# EAGLE board reduktor (EAGLE 6.5.0)
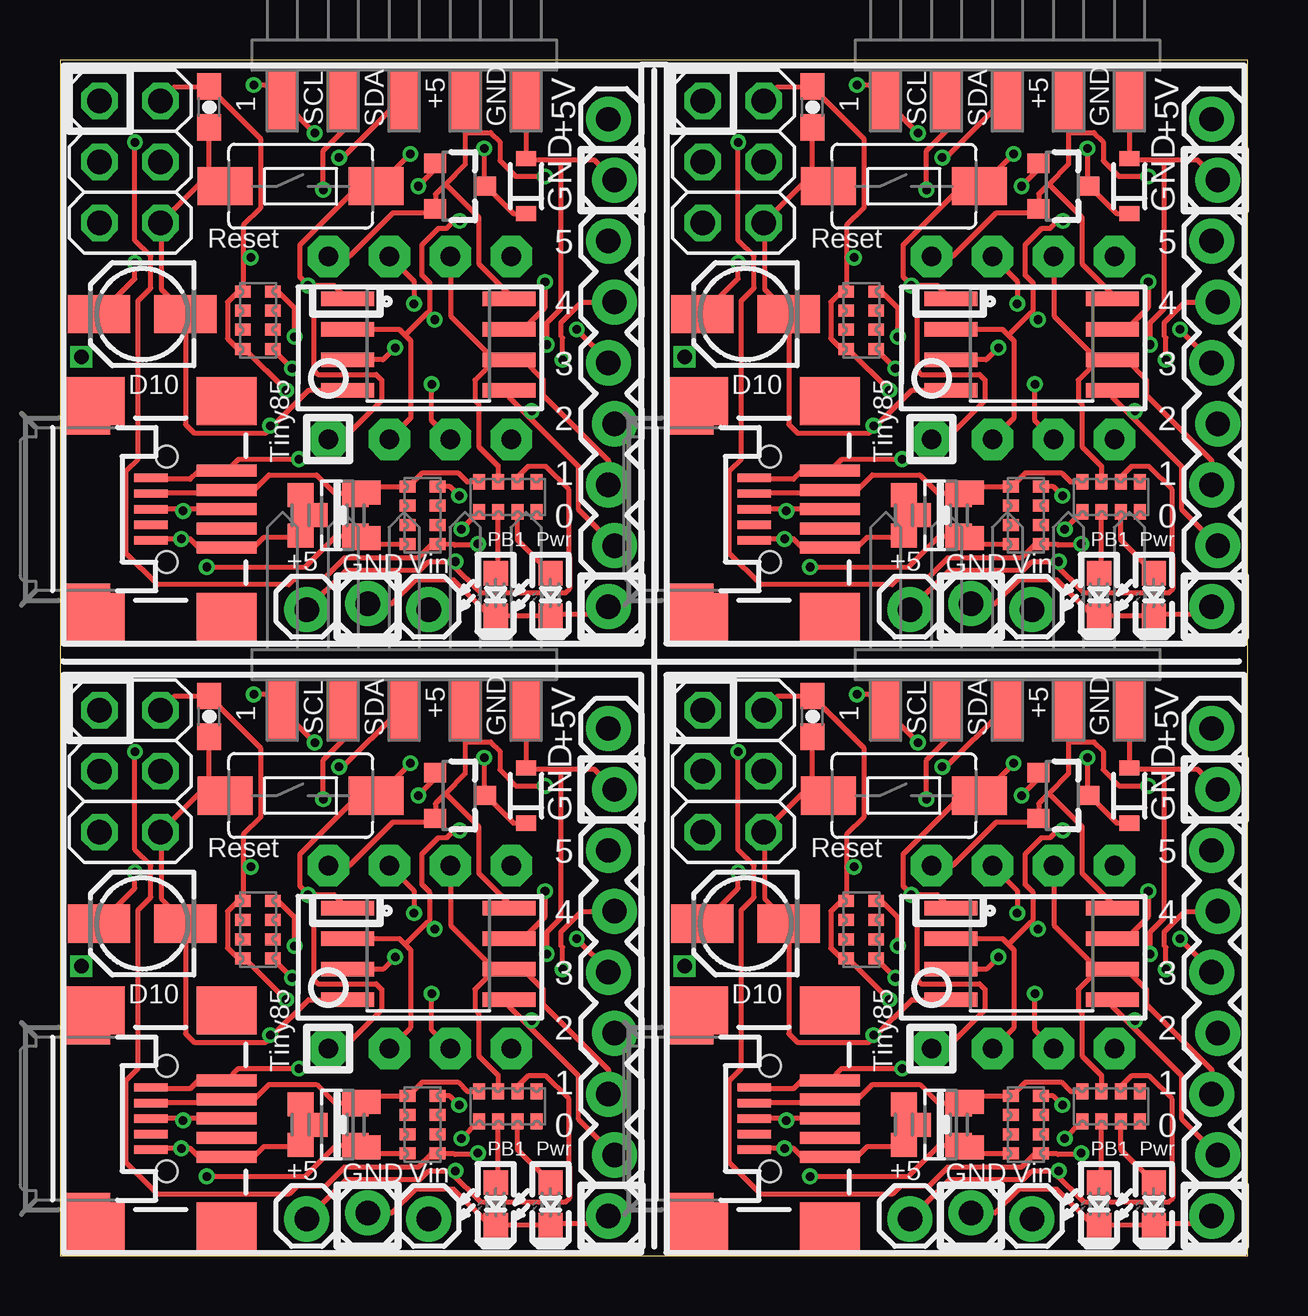
[diagram p0: board, top side]
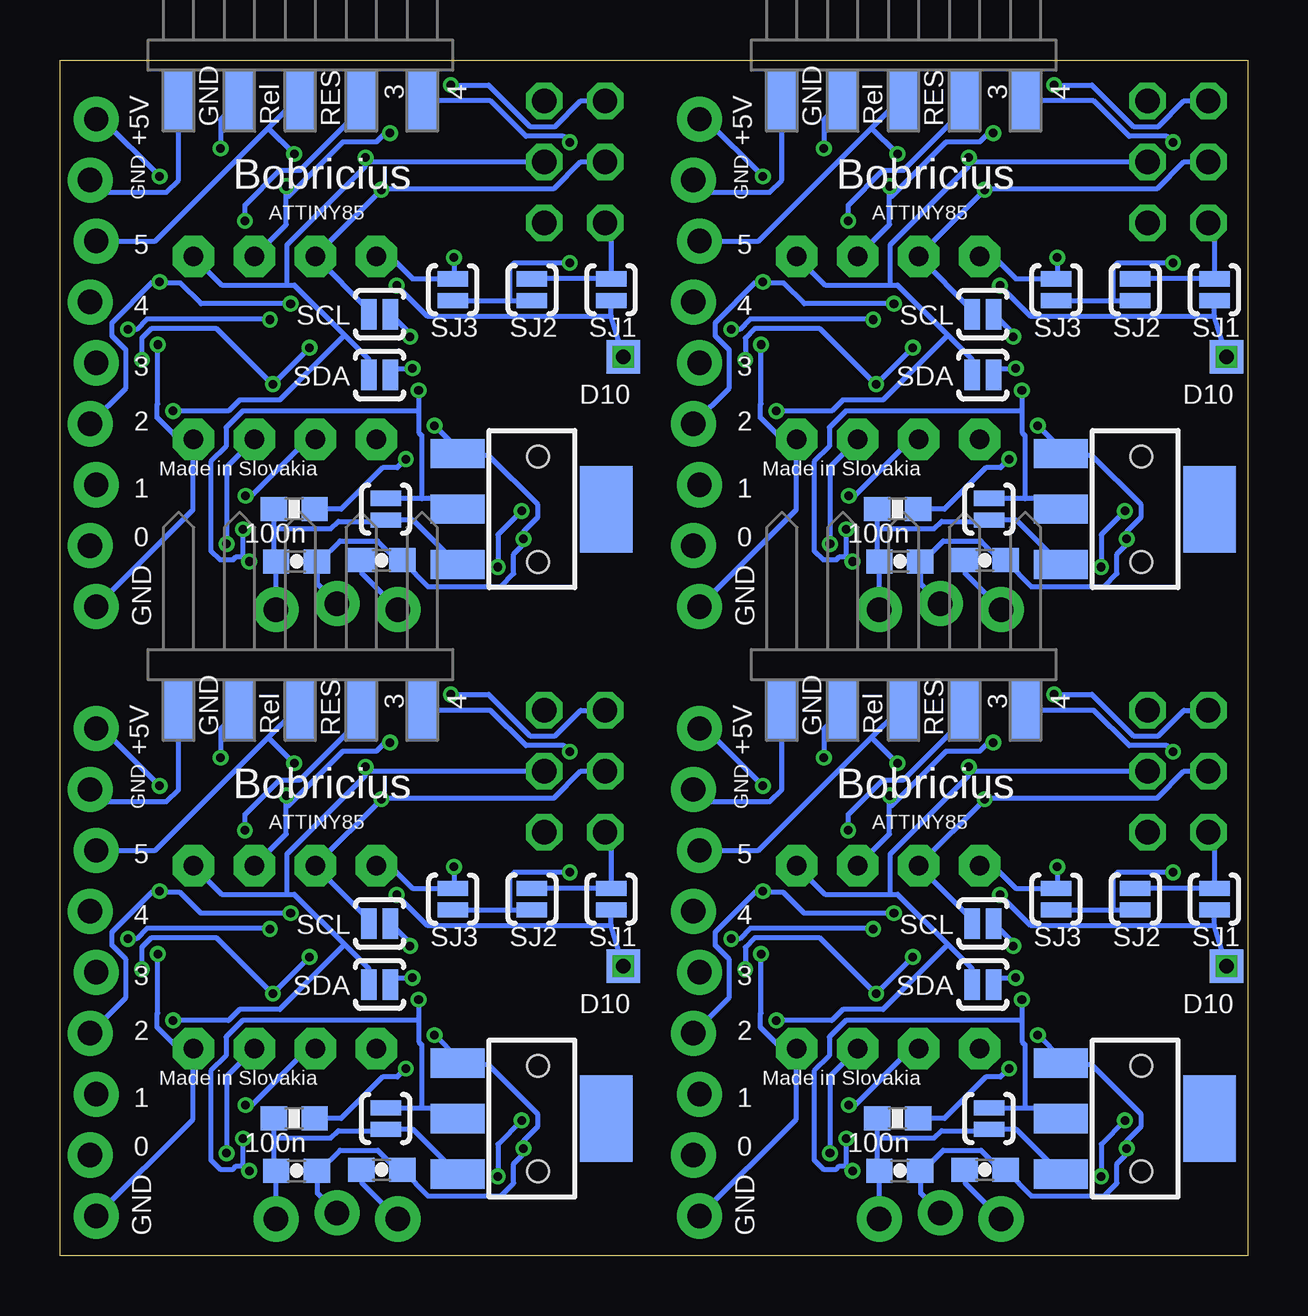
[diagram p1: board, bottom side, seen from below]

Size 49.52 x 49.84 mm. Coordinates in mm from the lower left corner, seen from the top.
Outline: 0,0 49.52,0 49.52,49.84 0,49.84 0,0
Copper layers (1*16): Top 0.035mm / dielectric 1.5mm / Bottom 0.035mm
Design rules "ITEADstudio_DRC": minimum track width 6mil, minimum drill 12mil, track to track 6mil, track to pad 6mil, pad to pad 6mil, via to via 6mil, smd to smd 0mil, copper to edge 10mil, drill to drill 10mil, minimum pad ring 10mil, minimum via ring 6mil, stop-mask expansion 2mil, vias tented up to drill 100mil, thermal gap 10mil
Net classes: 0 default: width 0.203 mm, drill 0.356 mm, clearance 0.203 mm; 1 GND: width 0.203 mm, drill 0.356 mm, clearance 0.203 mm; 2 pwr: width 0.203 mm, drill 0.356 mm, clearance 0.203 mm

## Footprints (pad centres in the part's own frame; a part is rotated, then mirrored left to right if it is on the bottom)
SO08-EIAJ = smd 0.61 x 2.21: 1 -1.905,-3.378; 2 -0.635,-3.378; 3 0.635,-3.378; 4 1.905,-3.378; 5 1.905,3.353; 6 0.635,3.353; 7 -0.635,3.353; 8 -1.905,3.353
0603-CAP = smd 1.1 x 1: 1 -0.85,0; 2 0.85,0
153CLV-0405 = smd 2.6 x 1.6: + 1.8,0; - -1.8,0
SOD-323 = smd 0.63 x 0.83: 1 -1.15,0; 2 1.15,0
SOT23 = smd 1 x 1.4: 1 -0.95,-1.1; 2 0.95,-1.1; 3 0,1.1
TP14SQ = smd 1.4 x 1.4: TP 0,0
SJ_2S-NO = smd 0.635 x 1.27: 1 -0.45,0; 2 0.45,0
SOT223 = smd 1.219 x 2.235: 1 -2.311,-3.099; 2 0,-3.099; 3 2.311,-3.099 | smd 3.6 x 2.2: 4 0,3.099
2X03 = drill 1.016 octagon: 1 -2.54,-1.27; 2 -2.54,1.27; 3 0,-1.27; 4 0,1.27; 5 2.54,-1.27; 6 2.54,1.27
1X03_LOCK = drill 1.016 pad 1.88: 1 0,0.127; 2 2.54,-0.127; 3 5.08,0.127
1X09_LOCK = drill 1.016 pad 1.88: 1 0,0.127; 2 2.54,-0.127; 3 5.08,0.127; 4 7.62,-0.127; 5 10.16,0.127; 6 12.7,-0.127; 7 15.24,0.127; 8 17.78,-0.127; 9 20.32,0.127
LED-0603 = smd 1.016 x 1.016: A 0.889,0; C -0.889,0
0603-RES = smd 1.1 x 1: 1 -0.85,0; 2 0.85,0
R0603 = smd 1 x 1.1: 1 -0.85,0; 2 0.85,0
TACTILE-SWITCH-1101NE = smd 2.3 x 1.6: P$1 -3.15,0; P$2 3.15,0
0603-ARC = smd 0.5 x 0.65: 1 -1.2,-0.625; 2 -0.4,-0.625; 3 0.4,-0.625; 4 1.2,-0.625; 5 1.2,0.625; 6 0.4,0.625; 7 -0.4,0.625; 8 -1.2,0.625
ES_SOT23-3 = smd 0.8 x 0.9: 1 -0.95,-1; 2 0.95,-1; 3 0,1.1
DIP08 = drill 0.813 pad 1.727 octagon: 1 -3.81,-3.81; 2 -1.27,-3.81; 3 1.27,-3.81; 4 3.81,-3.81; 5 3.81,3.81; 6 1.27,3.81; 7 -1.27,3.81; 8 -3.81,3.81
10_PIN_EDGE = smd 1.27 x 2.54: 1 5.08,0; 3 2.54,0; 5 0,0; 7 -2.54,0; 9 -5.08,0 | smd 1.27 x 2.54 bottom: 2 5.08,0; 4 2.54,0; 6 0,0; 8 -2.54,0; 10 -5.08,0
USB-MINIB = smd 2.5 x 0.5: D+ 2.5,0; D- 2.5,0.8; GND 2.5,-1.6; ID 2.5,-0.8; VBUS 2.5,1.6 | smd 2.5 x 2: MTN1 -3,4.5; MTN2 2.5,4.5; MTN3 -3,-4.5; MTN4 2.5,-4.5 | hole 0.9: 0,2.2; 0,-2.2
USB-MICROB = smd 0.35 x 1.4: D+ 0,2.65; D- -0.65,2.65; GND 1.3,2.65; ID 0.65,2.65; VBUS -1.3,2.65 | smd 1.8 x 1.9: MT1 -4,0; MT2 4,0

## Placement (x,y rotation side)
ATTINY1  ATTINY45  [SO08-EIAJ]  15.37,37.97 270 top
ATTINY2  ATTINY45  [SO08-EIAJ]  15.37,12.57 270 top
ATTINY3  ATTINY45  [SO08-EIAJ]  40.51,12.57 270 top
ATTINY85  ATTINY45  [SO08-EIAJ]  40.51,37.97 270 top
C1  0.1uf  [0603-CAP]  36.1,28.98 180 bottom
C2  0.1uf  [0603-CAP]  39.66,28.94 180 bottom
C3  0.1uf  [0603-CAP]  31.37,47.88 90 top
C4  0.1uf  [0603-CAP]  10.96,28.98 180 bottom
C5  100  [153CLV-0405]  28.57,39.24 180 top
C6  0.1uf  [0603-CAP]  14.51,28.94 180 bottom
C7  0.1uf  [0603-CAP]  6.22,47.88 90 top
C8  100  [153CLV-0405]  3.43,39.24 180 top
C9  0.1uf  [0603-CAP]  10.96,3.59 180 bottom
C10  0.1uf  [0603-CAP]  14.51,3.54 180 bottom
C11  0.1uf  [0603-CAP]  6.22,22.48 90 top
C12  100  [153CLV-0405]  3.43,13.84 180 top
C13  0.1uf  [0603-CAP]  36.1,3.59 180 bottom
C14  0.1uf  [0603-CAP]  39.66,3.54 180 bottom
C15  0.1uf  [0603-CAP]  31.37,22.48 90 top
C16  100  [153CLV-0405]  28.57,13.84 180 top
D1  [SOD-323]  19.43,44.58 90 top
D2  [SOD-323]  44.58,44.58 90 top
D3  3.6V dual zener  [SOT23]  36.7,30.86 90 top
D4  3.6V dual zener  [SOT23]  11.56,30.86 90 top
D5  PTR1TP14SQ  [TP14SQ]  0.89,37.47 0 bottom
D6  [SOD-323]  19.43,19.18 90 top
D7  3.6V dual zener  [SOT23]  11.56,5.46 90 top
D8  PTR1TP14SQ  [TP14SQ]  0.89,12.07 0 bottom
D9  [SOD-323]  44.58,19.18 90 top
D10  PTR1TP14SQ  [TP14SQ]  26.04,37.47 0 bottom
D11  3.6V dual zener  [SOT23]  36.7,5.46 90 top
D12  PTR1TP14SQ  [TP14SQ]  26.04,12.07 0 bottom
FUSE1  SOLDERJUMPERNO  [SJ_2S-NO]  26.54,40.26 90 bottom
FUSE2  SOLDERJUMPERNO  [SJ_2S-NO]  35.94,31.12 90 bottom
FUSE3  SOLDERJUMPERNO  [SJ_2S-NO]  29.85,40.26 270 bottom
FUSE4  SOLDERJUMPERNO  [SJ_2S-NO]  36.2,39.24 0 bottom
FUSE5  SOLDERJUMPERNO  [SJ_2S-NO]  36.2,36.7 0 bottom
FUSE6  SOLDERJUMPERNO  [SJ_2S-NO]  33.15,40.26 270 bottom
FUSE7  SOLDERJUMPERNO  [SJ_2S-NO]  10.8,31.12 90 bottom
FUSE8  SOLDERJUMPERNO  [SJ_2S-NO]  1.4,40.26 90 bottom
FUSE9  SOLDERJUMPERNO  [SJ_2S-NO]  4.7,40.26 270 bottom
FUSE10  SOLDERJUMPERNO  [SJ_2S-NO]  11.05,39.24 0 bottom
FUSE11  SOLDERJUMPERNO  [SJ_2S-NO]  11.05,36.7 0 bottom
FUSE12  SOLDERJUMPERNO  [SJ_2S-NO]  8,40.26 270 bottom
FUSE13  SOLDERJUMPERNO  [SJ_2S-NO]  10.8,5.71 90 bottom
FUSE14  SOLDERJUMPERNO  [SJ_2S-NO]  1.4,14.86 90 bottom
FUSE15  SOLDERJUMPERNO  [SJ_2S-NO]  4.7,14.86 270 bottom
FUSE16  SOLDERJUMPERNO  [SJ_2S-NO]  11.05,13.84 0 bottom
FUSE17  SOLDERJUMPERNO  [SJ_2S-NO]  11.05,11.3 0 bottom
FUSE18  SOLDERJUMPERNO  [SJ_2S-NO]  8,14.86 270 bottom
FUSE19  SOLDERJUMPERNO  [SJ_2S-NO]  35.94,5.71 90 bottom
FUSE20  SOLDERJUMPERNO  [SJ_2S-NO]  26.54,14.86 90 bottom
FUSE21  SOLDERJUMPERNO  [SJ_2S-NO]  29.85,14.86 270 bottom
FUSE22  SOLDERJUMPERNO  [SJ_2S-NO]  36.2,13.84 0 bottom
FUSE23  SOLDERJUMPERNO  [SJ_2S-NO]  36.2,11.3 0 bottom
FUSE24  SOLDERJUMPERNO  [SJ_2S-NO]  33.15,14.86 270 bottom
IC1  [SOT223]  4.7,31.12 270 bottom
IC2  [SOT223]  29.85,31.12 270 bottom
IC3  [SOT223]  4.7,5.71 270 bottom
IC4  [SOT223]  29.85,5.71 270 bottom
JP1  [2X03]  28.07,45.59 270 top
JP2  [1X03_LOCK]  40.51,27.05 180 top
JP3  M09LOCK  [1X09_LOCK]  48.13,27.05 90 top
JP4  [1X03_LOCK]  15.37,27.05 180 top
JP5  M09LOCK  [1X09_LOCK]  22.99,27.05 90 top
JP6  [2X03]  2.92,45.59 270 top
JP7  [1X03_LOCK]  15.37,1.65 180 top
JP8  M09LOCK  [1X09_LOCK]  22.99,1.65 90 top
JP9  [2X03]  2.92,20.19 270 top
JP10  [1X03_LOCK]  40.51,1.65 180 top
JP11  M09LOCK  [1X09_LOCK]  48.13,1.65 90 top
JP12  [2X03]  28.07,20.19 270 top
PB1  NA  [LED-0603]  43.31,27.56 90 top
PB2  NA  [LED-0603]  18.16,27.56 90 top
PB3  NA  [LED-0603]  18.16,2.16 90 top
PB4  NA  [LED-0603]  43.31,2.16 90 top
PWR  NA  [LED-0603]  45.59,27.56 90 top
PWR1  NA  [LED-0603]  20.45,27.56 90 top
PWR2  NA  [LED-0603]  20.45,2.16 90 top
PWR3  NA  [LED-0603]  45.59,2.16 90 top
R1  [0603-RES]  14.61,31.12 0 bottom
R2  [0603-RES]  39.75,31.12 0 bottom
R3  1k5  [R0603]  10.03,30.86 90 top
R4  1k5  [R0603]  35.18,30.86 90 top
R5  1k5  [R0603]  37.47,30.86 270 top
R6  1k5  [R0603]  12.32,30.86 270 top
R7  [0603-RES]  14.61,5.71 0 bottom
R8  1k5  [R0603]  10.03,5.46 90 top
R9  1k5  [R0603]  12.32,5.46 270 top
R10  [0603-RES]  39.75,5.71 0 bottom
R11  1k5  [R0603]  35.18,5.46 90 top
R12  1k5  [R0603]  37.47,5.46 270 top
RESET  [TACTILE-SWITCH-1101NE]  35.18,44.58 0 top
RESET1  [TACTILE-SWITCH-1101NE]  10.03,44.58 0 top
RESET2  [TACTILE-SWITCH-1101NE]  10.03,19.18 0 top
RESET3  [TACTILE-SWITCH-1101NE]  35.18,19.18 0 top
RN1  68  [0603-ARC]  40.26,30.86 90 top
RN2  1k5  [0603-ARC]  43.81,31.62 0 top
RN3  4k7  [0603-ARC]  33.4,38.99 90 top
RN4  68  [0603-ARC]  15.11,30.86 90 top
RN5  1k5  [0603-ARC]  18.67,31.62 0 top
RN6  4k7  [0603-ARC]  8.26,38.99 90 top
RN7  68  [0603-ARC]  15.11,5.46 90 top
RN8  1k5  [0603-ARC]  18.67,6.22 0 top
RN9  4k7  [0603-ARC]  8.26,13.59 90 top
RN10  68  [0603-ARC]  40.26,5.46 90 top
RN11  1k5  [0603-ARC]  43.81,6.22 0 top
RN12  4k7  [0603-ARC]  33.4,13.59 90 top
T1  PDTA114ET  [ES_SOT23-3]  41.78,44.58 270 top
T2  PDTA114ET  [ES_SOT23-3]  16.64,44.58 270 top
T3  PDTA114ET  [ES_SOT23-3]  16.64,19.18 270 top
T4  PDTA114ET  [ES_SOT23-3]  41.78,19.18 270 top
U1  TINY85  [DIP08]  40.14,37.84 0 top
U2  TINY85  [DIP08]  15,37.84 0 top
U3  TINY85  [DIP08]  15,12.44 0 top
U4  TINY85  [DIP08]  40.14,12.44 0 top
U$1  10_PIN_EDGE10_PIN_EDGE  [10_PIN_EDGE]  14.35,48.13 180 bottom
U$2  10_PIN_EDGE10_PIN_EDGE  [10_PIN_EDGE]  39.5,48.13 180 bottom
U$3  10_PIN_EDGE10_PIN_EDGE  [10_PIN_EDGE]  14.35,22.73 180 bottom
U$4  10_PIN_EDGE10_PIN_EDGE  [10_PIN_EDGE]  39.5,22.73 180 bottom
X1  USBSMD  [USB-MINIB]  4.45,31.12 0 top
X2  USB-MICROB  [USB-MICROB]  1.14,31.12 270 top
X3  USBSMD  [USB-MINIB]  4.45,5.71 0 top
X4  USB-MICROB  [USB-MICROB]  1.14,5.71 270 top
X5  USBSMD  [USB-MINIB]  29.59,31.12 0 top
X6  USB-MICROB  [USB-MICROB]  26.29,31.12 270 top
X7  USBSMD  [USB-MINIB]  29.59,5.71 0 top
X8  USB-MICROB  [USB-MICROB]  26.29,5.71 270 top

## Library data of the parts
ATTINY1-ATTINY3 ATTINY85 C1-C4 C6 C7 C9-C11 C13-C15 D1 D2 D6 D9 FUSE1-FUSE24 IC1-IC4 JP2-JP5 JP7 JP8 JP10 JP11 R1 R2 R7 R10 RESET RESET1-RESET3 X1-X8 = SparkFun
C5 C8 C12 C16 R3-R6 R8 R9 R11 R12 = resistor
D3 D4 D7 D11 = diode
D5 D8 D10 D12 = testpad
JP1 JP6 JP9 JP12 = pinhead
PB1-PB4 PWR PWR1-PWR3 = DOUBLE-SIDE
RN1-RN12 = resistor-dil; OC_FARNELL: unknown; OC_NEWARK: unknown
T1-T4 = pnp_digital_transistor
U1-U4 = SparkFun-DigitalIC; PROD_ID: IC-09439
U$1-U$4 = eclibrary

## Nets
D+: D3.1 R5.2 RN1.8 X5.D+ X6.D+
D+1: D4.1 R6.2 RN4.8 X1.D+ X2.D+
D+2: D7.1 R9.2 RN7.8 X3.D+ X4.D+
D+3: D11.1 R12.2 RN10.8 X7.D+ X8.D+
D-: D3.2 R5.1 RN1.5 RN2.8 X5.D- X6.D-
D-1: D4.2 R6.1 RN4.5 RN5.8 X1.D- X2.D-
D-2: D7.2 R9.1 RN7.5 RN8.8 X3.D- X4.D-
D-3: D11.2 R12.1 RN10.5 RN11.8 X7.D- X8.D-
GND: ATTINY85.4 C1.1 C2.1 C3.1 C5.- D2.2 D3.3 IC2.1 JP1.6 JP2.2 JP3.1 JP3.8 PB1.C PWR.C R4.1 R4.2 RESET.P$1 U1.4 U$2.1 U$2.2 X5.GND X6.GND
GND1: ATTINY1.4 C4.1 C6.1 C7.1 C8.- D1.2 D4.3 IC1.1 JP4.2 JP5.1 JP5.8 JP6.6 PB2.C PWR1.C R3.1 R3.2 RESET1.P$1 U2.4 U$1.1 U$1.2 X1.GND X2.GND
GND2: ATTINY2.4 C9.1 C10.1 C11.1 C12.- D6.2 D7.3 IC3.1 JP7.2 JP8.1 JP8.8 JP9.6 PB3.C PWR2.C R8.1 R8.2 RESET2.P$1 U3.4 U$3.1 U$3.2 X3.GND X4.GND
GND3: ATTINY3.4 C13.1 C14.1 C15.1 C16.- D9.2 D11.3 IC4.1 JP10.2 JP11.1 JP11.8 JP12.6 PB4.C PWR3.C R11.1 R11.2 RESET3.P$1 U4.4 U$4.1 U$4.2 X7.GND X8.GND
N$1 [pwr]: PWR1.A RN5.3
N$2: FUSE10.2 RN6.4
N$3 [pwr]: PWR.A RN2.3
N$4: FUSE11.2 RN6.1
N$5: C8.+ FUSE9.2 FUSE12.2
N$6 [pwr]: PWR2.A RN8.3
N$7: FUSE16.2 RN9.4
N$8: FUSE4.2 RN3.4
N$9: FUSE5.2 RN3.1
N$10: C5.+ FUSE3.2 FUSE6.2
N$11: FUSE17.2 RN9.1
N$12: C12.+ FUSE15.2 FUSE18.2
N$13 [pwr]: PWR3.A RN11.3
N$14: FUSE22.2 RN12.4
N$15: FUSE23.2 RN12.1
N$16: C16.+ FUSE21.2 FUSE24.2
PB1: ATTINY85.6 JP1.1 JP3.3 RN2.7 T1.1 U1.6 U$2.10
PB2: ATTINY1.6 JP5.3 JP6.1 RN5.7 T2.1 U2.6 U$1.10
PB3: ATTINY2.6 JP8.3 JP9.1 RN8.7 T3.1 U3.6 U$3.10
PB4: ATTINY3.6 JP11.3 JP12.1 RN11.7 T4.1 U4.6 U$4.10
PIN1R: PB1.A RN2.2
PIN1R1: PB2.A RN5.2
PIN1R2: PB3.A RN8.2
PIN1R3: PB4.A RN11.2
REL [pwr]: D2.1 T1.3 U$2.3
REL1 [pwr]: D1.1 T2.3 U$1.3
REL2 [pwr]: D6.1 T3.3 U$3.3
REL3 [pwr]: D9.1 T4.3 U$4.3
RES: ATTINY85.1 D10.TP FUSE1.1 JP3.7 RESET.P$2 U1.1 U$2.5
RES1: ATTINY1.1 D5.TP FUSE8.1 JP5.7 RESET1.P$2 U2.1 U$1.5
RES2: ATTINY2.1 D8.TP FUSE14.1 JP8.7 RESET2.P$2 U3.1 U$3.5
RES3: ATTINY3.1 D12.TP FUSE20.1 JP11.7 RESET3.P$2 U4.1 U$4.5
RESA: FUSE1.2 FUSE3.1 JP1.5
RESA1: FUSE8.2 FUSE9.1 JP6.5
RESA2: FUSE14.2 FUSE15.1 JP9.5
RESA3: FUSE20.2 FUSE21.1 JP12.5
SCL: ATTINY85.7 FUSE4.1 JP1.3 JP3.4 U1.7 U$2.8
SCL1: ATTINY1.7 FUSE10.1 JP5.4 JP6.3 U2.7 U$1.8
SCL2: ATTINY2.7 FUSE16.1 JP8.4 JP9.3 U3.7 U$3.8
SCL3: ATTINY3.7 FUSE22.1 JP11.4 JP12.3 U4.7 U$4.8
SDA: ATTINY85.5 FUSE5.1 JP1.4 JP3.2 U1.5 U$2.6
SDA1: ATTINY1.5 FUSE11.1 JP5.2 JP6.4 U2.5 U$1.6
SDA2: ATTINY2.5 FUSE17.1 JP8.2 JP9.4 U3.5 U$3.6
SDA3: ATTINY3.5 FUSE23.1 JP11.2 JP12.4 U4.5 U$4.6
USBM: ATTINY85.2 JP3.5 RN1.4 U1.2 U$2.7
USBM1: ATTINY1.2 JP5.5 RN4.4 U2.2 U$1.7
USBM2: ATTINY2.2 JP8.5 RN7.4 U3.2 U$3.7
USBM3: ATTINY3.2 JP11.5 RN10.4 U4.2 U$4.7
USBP: ATTINY85.3 JP3.6 RN1.1 U1.3 U$2.9
USBP1: ATTINY1.3 JP5.6 RN4.1 U2.3 U$1.9
USBP2: ATTINY2.3 JP8.6 RN7.1 U3.3 U$3.9
USBP3: ATTINY3.3 JP11.6 RN10.1 U4.3 U$4.9
VCC [pwr]: ATTINY85.8 C1.2 C3.2 FUSE2.2 FUSE6.1 IC2.2 JP1.2 JP2.3 JP3.9 RN2.1 RN2.6 RN3.5 RN3.8 T1.2 U1.8 U$2.4
VCC1 [pwr]: ATTINY1.8 C4.2 C7.2 FUSE7.2 FUSE12.1 IC1.2 JP4.3 JP5.9 JP6.2 RN5.1 RN5.6 RN6.5 RN6.8 T2.2 U2.8 U$1.4
VCC2 [pwr]: ATTINY2.8 C9.2 C11.2 FUSE13.2 FUSE18.1 IC3.2 JP7.3 JP8.9 JP9.2 RN8.1 RN8.6 RN9.5 RN9.8 T3.2 U3.8 U$3.4
VCC3 [pwr]: ATTINY3.8 C13.2 C15.2 FUSE19.2 FUSE24.1 IC4.2 JP10.3 JP11.9 JP12.2 RN11.1 RN11.6 RN12.5 RN12.8 T4.2 U4.8 U$4.4
VIN: C2.2 FUSE2.1 IC2.3 JP2.1 R2.1
VIN1: C6.2 FUSE7.1 IC1.3 JP4.1 R1.1
VIN2: C10.2 FUSE13.1 IC3.3 JP7.1 R7.1
VIN3: C14.2 FUSE19.1 IC4.3 JP10.1 R10.1
VUSB: R2.2 X5.VBUS X6.VBUS
VUSB1: R1.2 X1.VBUS X2.VBUS
VUSB2: R7.2 X3.VBUS X4.VBUS
VUSB3: R10.2 X7.VBUS X8.VBUS

## Tracks (layer width: path | path; a pad name or v marks a point on that pad's centre or on a via)
D+  (via drill 0.36)
  Top 0.203: RN1.8 38.05,29.67 37.82,29.9 R5.2 37.8,29.92 D3.1 37.36,30 36.65,30 35.36,28.7 v31.27,28.7 | X5.D+ 30.28,31.12 | 30.28,31.12 X6.D+ | v30.28,31.04 30.28,31.12
  Bottom 0.203: v31.27,28.7 31.27,30.05 v30.28,31.04
D+1  (via drill 0.36)
  Top 0.203: RN4.8 14.48,29.67 12.9,29.67 12.68,29.9 R6.2 12.65,29.92 D4.1 12.22,30 11.51,30 10.21,28.7 v6.12,28.7 | X1.D+ 5.13,31.12 | 5.13,31.12 X2.D+ | v5.13,31.04 5.13,31.12
  Bottom 0.203: v6.12,28.7 6.12,30.05 v5.13,31.04
D+2  (via drill 0.36)
  Top 0.203: RN7.8 14.48,4.27 12.9,4.27 12.68,4.5 R9.2 12.65,4.52 D7.1 12.22,4.6 11.51,4.6 10.21,3.3 v6.12,3.3 | X3.D+ 5.13,5.71 | 5.13,5.71 X4.D+ | v5.13,5.64 5.13,5.71
  Bottom 0.203: v6.12,3.3 6.12,4.65 v5.13,5.64
D+3  (via drill 0.36)
  Top 0.203: RN10.8 38.05,4.27 37.82,4.5 R12.2 37.8,4.52 D11.1 37.36,4.6 36.65,4.6 35.36,3.3 v31.27,3.3 | X7.D+ 30.28,5.71 | 30.28,5.71 X8.D+ | v30.28,5.64 30.28,5.71
  Bottom 0.203: v31.27,3.3 31.27,4.65 v30.28,5.64
D-
  Top 0.203: RN2.8 42.6,32.26 42.11,32.26 41.73,32.64 40.26,32.64 39.73,32.11 RN1.5 38.05,32.05 37.82,31.83 D3.2 37.74,31.73 37.47,31.73 R5.1 37.39,31.77 36.6,31.77 35.84,32.54 33.86,32.54 33.27,31.95 32.18,31.95 X5.D- 32.08,31.9 31.95,31.77 28.96,31.77 X6.D-
D-1
  Top 0.203: RN5.8 17.45,32.26 16.97,32.26 16.59,32.64 15.11,32.64 14.58,32.11 RN4.5 14.48,32.05 12.9,32.05 12.68,31.83 D4.2 12.6,31.73 12.32,31.73 R6.1 12.24,31.77 11.46,31.77 10.69,32.54 8.71,32.54 8.13,31.95 7.04,31.95 X1.D- 6.93,31.9 6.81,31.77 3.81,31.77 X2.D-
D-2
  Top 0.203: RN8.8 17.45,6.86 16.97,6.86 16.59,7.24 15.11,7.24 14.58,6.71 RN7.5 14.48,6.66 12.9,6.66 12.68,6.43 D7.2 12.6,6.32 12.32,6.32 R9.1 12.24,6.38 11.46,6.38 10.69,7.14 8.71,7.14 8.13,6.55 7.04,6.55 X3.D- 6.93,6.5 6.81,6.38 3.81,6.38 X4.D-
D-3
  Top 0.203: RN11.8 42.6,6.86 42.11,6.86 41.73,7.24 40.26,7.24 39.73,6.71 RN10.5 38.05,6.66 37.82,6.43 D11.2 37.74,6.32 37.47,6.32 R12.1 37.39,6.38 36.6,6.38 35.84,7.14 33.86,7.14 33.27,6.55 32.18,6.55 X7.D- 32.08,6.5 31.95,6.38 28.96,6.38 X8.D-
GND  (via drill 0.36)
  Top 0.203: C3.1 31.37,45.21 32,44.58 RESET.P$1 31.37,45.09 JP1.6 29.39,42.98 29.39,40.26 30.33,39.32 C5.- 30.38,34.65 30.73,34.29 33.73,34.29 33.97,34.53 | R4.2 35.18,30.58 D3.3 35.58,30.86 35.18,30.46 R4.1 35.1,29.95 33.66,29.95 33.33,29.62 32.16,29.62 X5.GND 32.08,29.54 30.91,29.54 30.58,29.87 v30.2,29.87 29.39,29.87 29.34,29.82 28.96,29.82 X6.GND | ATTINY85.4 35.51,36.07 33.97,34.53 | v33.91,34.59 33.97,34.53 | U$2.1 D2.2 44.65,45.67 46.02,45.67 | 46.02,45.67 47.42,45.67 JP3.8 | JP3.1 47.68,26.72 45.67,26.72 PWR.C PB1.C 43.23,26.72 43,26.72 41.55,28.17 39.98,28.17 38.99,27.18 JP2.2 | 46.02,45.67 46.02,39.47 45.44,38.89 v45.44,37.97
  Bottom 0.203: v33.91,34.59 32.94,33.63 IC2.1 32.87,33.38 31.67,33.38 29.62,31.32 29.62,30.76 30.2,30.18 v30.2,29.87 30.25,30.05 30.25,29.59 30.61,29.23 30.61,28.42 31.14,27.89 34.19,27.89 35.2,28.91 C1.1 35.25,29.01 35.48,29.01 36.27,29.79 37.85,29.79 38.68,28.96 C2.1 38.79,28.93 38.79,27.99 JP2.2 | U$2.1 44.58,44.83 45.08,44.32 47.75,44.32 JP3.8 | JP3.1 43.97,31.09 43.97,34.01 U1.4 44.04,33.5 45.47,34.92 45.47,35.48 45.44,35.51 v45.44,37.97
GND1  (via drill 0.36)
  Top 0.203: C7.1 6.22,45.21 6.86,44.58 RESET1.P$1 6.22,45.09 JP6.6 4.24,42.98 4.24,40.26 5.18,39.32 C8.- 5.23,34.65 5.59,34.29 8.59,34.29 8.83,34.53 | R3.2 10.03,30.58 D4.3 10.44,30.86 10.03,30.46 R3.1 9.96,29.95 8.51,29.95 8.18,29.62 7.01,29.62 X1.GND 6.93,29.54 5.77,29.54 5.44,29.87 v5.05,29.87 4.24,29.87 4.19,29.82 3.81,29.82 X2.GND | ATTINY1.4 10.36,36.07 8.83,34.53 | v8.76,34.59 8.83,34.53 | U$1.1 D1.2 19.51,45.67 20.88,45.67 | 20.88,45.67 22.28,45.67 JP5.8 | JP5.1 22.53,26.72 20.52,26.72 PWR1.C PB2.C 18.08,26.72 17.86,26.72 16.41,28.17 14.83,28.17 13.84,27.18 JP4.2 | 20.88,45.67 20.88,39.47 20.29,38.89 v20.29,37.97
  Bottom 0.203: v8.76,34.59 7.8,33.63 IC1.1 7.72,33.38 6.53,33.38 4.47,31.32 4.47,30.76 5.05,30.18 v5.05,29.87 5.11,30.05 5.11,29.59 5.46,29.23 5.46,28.42 5.99,27.89 9.04,27.89 10.06,28.91 C4.1 10.11,29.01 10.34,29.01 11.12,29.79 12.7,29.79 13.54,28.96 C6.1 13.64,28.93 13.64,27.99 JP4.2 | U$1.1 19.43,44.83 19.94,44.32 22.61,44.32 JP5.8 | JP5.1 18.82,31.09 18.82,34.01 U2.4 18.9,33.5 20.32,34.92 20.32,35.48 20.29,35.51 v20.29,37.97
GND2  (via drill 0.36)
  Top 0.203: C11.1 6.22,19.81 6.86,19.18 RESET2.P$1 6.22,19.69 JP9.6 4.24,17.58 4.24,14.86 5.18,13.92 C12.- 5.23,9.25 5.59,8.89 8.59,8.89 8.83,9.13 | R8.2 10.03,5.18 D7.3 10.44,5.46 10.03,5.05 R8.1 9.96,4.55 8.51,4.55 8.18,4.22 7.01,4.22 X3.GND 6.93,4.14 5.77,4.14 5.44,4.47 v5.05,4.47 4.24,4.47 4.19,4.42 3.81,4.42 X4.GND | ATTINY2.4 10.36,10.67 8.83,9.13 | v8.76,9.2 8.83,9.13 | U$3.1 D6.2 19.51,20.27 20.88,20.27 | 20.88,20.27 22.28,20.27 JP8.8 | JP8.1 22.53,1.32 20.52,1.32 PWR2.C PB3.C 18.08,1.32 17.86,1.32 16.41,2.77 14.83,2.77 13.84,1.78 JP7.2 | 20.88,20.27 20.88,14.07 20.29,13.49 v20.29,12.57
  Bottom 0.203: v8.76,9.2 7.8,8.23 IC3.1 7.72,7.98 6.53,7.98 4.47,5.92 4.47,5.36 5.05,4.78 v5.05,4.47 5.11,4.65 5.11,4.19 5.46,3.84 5.46,3.02 5.99,2.49 9.04,2.49 10.06,3.5 C9.1 10.11,3.61 10.34,3.61 11.12,4.39 12.7,4.39 13.54,3.56 C10.1 13.64,3.53 13.64,2.59 JP7.2 | U$3.1 19.43,19.43 19.94,18.92 22.61,18.92 JP8.8 | JP8.1 18.82,5.69 18.82,8.61 U3.4 18.9,8.1 20.32,9.53 20.32,10.08 20.29,10.11 v20.29,12.57
GND3  (via drill 0.36)
  Top 0.203: C15.1 31.37,19.81 32,19.18 RESET3.P$1 31.37,19.69 JP12.6 29.39,17.58 29.39,14.86 30.33,13.92 C16.- 30.38,9.25 30.73,8.89 33.73,8.89 33.97,9.13 | R11.2 35.18,5.18 D11.3 35.58,5.46 35.18,5.05 R11.1 35.1,4.55 33.66,4.55 33.33,4.22 32.16,4.22 X7.GND 32.08,4.14 30.91,4.14 30.58,4.47 v30.2,4.47 29.39,4.47 29.34,4.42 28.96,4.42 X8.GND | ATTINY3.4 35.51,10.67 33.97,9.13 | v33.91,9.2 33.97,9.13 | U$4.1 D9.2 44.65,20.27 46.02,20.27 | 46.02,20.27 47.42,20.27 JP11.8 | JP11.1 47.68,1.32 45.67,1.32 PWR3.C PB4.C 43.23,1.32 43,1.32 41.55,2.77 39.98,2.77 38.99,1.78 JP10.2 | 46.02,20.27 46.02,14.07 45.44,13.49 v45.44,12.57
  Bottom 0.203: v33.91,9.2 32.94,8.23 IC4.1 32.87,7.98 31.67,7.98 29.62,5.92 29.62,5.36 30.2,4.78 v30.2,4.47 30.25,4.65 30.25,4.19 30.61,3.84 30.61,3.02 31.14,2.49 34.19,2.49 35.2,3.5 C13.1 35.25,3.61 35.48,3.61 36.27,4.39 37.85,4.39 38.68,3.56 C14.1 38.79,3.53 38.79,2.59 JP10.2 | U$4.1 44.58,19.43 45.08,18.92 47.75,18.92 JP11.8 | JP11.1 43.97,5.69 43.97,8.61 U4.4 44.04,8.1 45.47,9.53 45.47,10.08 45.44,10.11 v45.44,12.57
N$1
  Top 0.203: PWR1.A 19.07,29.82 RN5.3
N$2  (via drill 0.36)
  Top 0.203: v9.78,38.3 9.78,39.5 9.09,40.18 RN6.4
  Bottom 0.203: v9.78,38.3 9.78,38.43 FUSE10.2
N$3
  Top 0.203: PWR.A 44.22,29.82 RN2.3
N$4  (via drill 0.36)
  Top 0.203: v9.68,36.98 8.89,37.77 RN6.1
  Bottom 0.203: v9.68,36.98 10.31,36.98 FUSE11.2
N$5  (via drill 0.36)
  Top 0.203: v3.12,41.38 3.12,40.72 1.65,39.24 C8.+
  Bottom 0.203: 5.64,39.8 FUSE12.2 | 5.64,39.8 FUSE9.2 | 5.64,39.8 5.64,41.17 5.44,41.38 v3.12,41.38
N$6
  Top 0.203: PWR2.A 19.07,4.42 RN8.3
N$7  (via drill 0.36)
  Top 0.203: v9.78,12.9 9.78,14.1 9.09,14.78 RN9.4
  Bottom 0.203: v9.78,12.9 9.78,13.03 FUSE16.2
N$8  (via drill 0.36)
  Top 0.203: v34.92,38.3 34.92,39.5 34.24,40.18 34.04,40.18 RN3.4
  Bottom 0.203: v34.92,38.3 34.92,38.43 FUSE4.2
N$9  (via drill 0.36)
  Top 0.203: v34.82,36.98 34.04,37.77 RN3.1
  Bottom 0.203: v34.82,36.98 35.46,36.98 FUSE5.2
N$10  (via drill 0.36)
  Top 0.203: v28.27,41.38 28.27,40.72 26.8,39.24 C5.+
  Bottom 0.203: 30.79,39.8 FUSE6.2 | 30.79,39.8 FUSE3.2 | 30.79,39.8 30.79,41.17 30.58,41.38 v28.27,41.38
N$11  (via drill 0.36)
  Top 0.203: v9.68,11.58 8.89,12.37 RN9.1
  Bottom 0.203: v9.68,11.58 10.31,11.58 FUSE17.2
N$12  (via drill 0.36)
  Top 0.203: v3.12,15.98 3.12,15.32 1.65,13.84 C12.+
  Bottom 0.203: 5.64,14.4 FUSE18.2 | 5.64,14.4 FUSE15.2 | 5.64,14.4 5.64,15.77 5.44,15.98 v3.12,15.98
N$13
  Top 0.203: PWR3.A 44.22,4.42 RN11.3
N$14  (via drill 0.36)
  Top 0.203: v34.92,12.9 34.92,14.1 34.24,14.78 34.04,14.78 RN12.4
  Bottom 0.203: v34.92,12.9 34.92,13.03 FUSE22.2
N$15  (via drill 0.36)
  Top 0.203: v34.82,11.58 34.04,12.37 RN12.1
  Bottom 0.203: v34.82,11.58 35.46,11.58 FUSE23.2
N$16  (via drill 0.36)
  Top 0.203: v28.27,15.98 28.27,15.32 26.8,13.84 C16.+
  Bottom 0.203: 30.79,14.4 FUSE24.2 | 30.79,14.4 FUSE21.2 | 30.79,14.4 30.79,15.77 30.58,15.98 v28.27,15.98
PB1  (via drill 0.36)
  Top 0.203: ATTINY85.6 43.28,37.34 42.44,36.5 42.44,35.64 42.6,35.48 42.6,33.73 43.41,32.92 43.41,32.26 RN2.7 | v40.08,44.58 40.77,45.26 40.77,45.52 T1.1 | v35.76,46.79 U$2.10 34.34,48.18 33.73,48.79 v33.22,48.79 | ATTINY85.6 43.2,37.39 41.43,39.17 41.43,41.63 U1.6 | JP3.3 48.01,33.15 45.29,35.87 45.29,36.5 44.45,37.34 ATTINY85.6
  Bottom 0.203: 40.08,44.14 40.08,42.98 41.4,41.66 U1.6 | 40.08,44.14 v40.08,44.58 | v35.76,46.79 35.97,46.79 36.32,46.43 37.72,46.43 40,44.14 40.08,44.14 | JP1.1 27.81,48.13 28.88,47.07 29.92,47.07 31.65,48.79 v33.22,48.79
PB2  (via drill 0.36)
  Top 0.203: ATTINY1.6 18.14,37.34 17.3,36.5 17.3,35.64 17.45,35.48 17.45,33.73 18.26,32.92 18.26,32.26 RN5.7 | v14.93,44.58 15.62,45.26 15.62,45.52 T2.1 | v10.62,46.79 U$1.10 9.2,48.18 8.59,48.79 v8.08,48.79 | ATTINY1.6 18.06,37.39 16.28,39.17 16.28,41.63 U2.6 | JP5.3 22.86,33.15 20.14,35.87 20.14,36.5 19.3,37.34 ATTINY1.6
  Bottom 0.203: 14.93,44.14 14.93,42.98 16.26,41.66 U2.6 | 14.93,44.14 v14.93,44.58 | v10.62,46.79 10.82,46.79 11.18,46.43 12.57,46.43 14.86,44.14 14.93,44.14 | JP6.1 2.67,48.13 3.73,47.07 4.78,47.07 6.5,48.79 v8.08,48.79
PB3  (via drill 0.36)
  Top 0.203: ATTINY2.6 18.14,11.94 17.3,11.1 17.3,10.24 17.45,10.08 17.45,8.33 18.26,7.52 RN8.7 | v14.93,19.18 15.62,19.86 15.62,20.12 T3.1 | v10.62,21.39 U$3.10 9.2,22.78 8.59,23.39 v8.08,23.39 | ATTINY2.6 18.06,11.99 16.28,13.77 16.28,16.23 U3.6 | JP8.3 22.86,7.75 20.14,10.46 20.14,11.1 19.3,11.94 ATTINY2.6
  Bottom 0.203: 14.93,18.75 14.93,17.58 16.26,16.26 U3.6 | 14.93,18.75 v14.93,19.18 | v10.62,21.39 10.82,21.39 11.18,21.03 12.57,21.03 14.86,18.75 14.93,18.75 | JP9.1 2.67,22.73 3.73,21.67 4.78,21.67 6.5,23.39 v8.08,23.39
PB4  (via drill 0.36)
  Top 0.203: ATTINY3.6 43.28,11.94 42.44,11.1 42.44,10.24 42.6,10.08 42.6,8.33 43.41,7.52 RN11.7 | v40.08,19.18 40.77,19.86 40.77,20.12 T4.1 | v35.76,21.39 U$4.10 34.34,22.78 33.73,23.39 v33.22,23.39 | ATTINY3.6 43.2,11.99 41.43,13.77 41.43,16.23 U4.6 | JP11.3 48.01,7.75 45.29,10.46 45.29,11.1 44.45,11.94 ATTINY3.6
  Bottom 0.203: 40.08,18.75 40.08,17.58 41.4,16.26 U4.6 | 40.08,18.75 v40.08,19.18 | v35.76,21.39 35.97,21.39 36.32,21.03 37.72,21.03 40,18.75 40.08,18.75 | JP12.1 27.81,22.73 28.88,21.67 29.92,21.67 31.65,23.39 v33.22,23.39
PIN1R
  Top 0.203: PB1.A 43.41,28.55 RN2.2
PIN1R1
  Top 0.203: PB2.A 18.26,28.55 RN5.2
PIN1R2
  Top 0.203: PB3.A 18.26,3.15 RN8.2
PIN1R3
  Top 0.203: PB4.A 43.41,3.15 RN11.2
REL  (via drill 0.36)
  Top 0.203: D2.1 44.04,43.43 42.9,44.58 T1.3 42.82,44.65 v42.82,46.15
  Bottom 0.203: v42.82,46.15 42.82,47.35 U$2.3
REL1  (via drill 0.36)
  Top 0.203: D1.1 18.9,43.43 17.75,44.58 T2.3 17.68,44.65 v17.68,46.15
  Bottom 0.203: v17.68,46.15 17.68,47.35 U$1.3
REL2  (via drill 0.36)
  Top 0.203: D6.1 18.9,18.03 17.75,19.18 T3.3 17.68,19.25 v17.68,20.75
  Bottom 0.203: v17.68,20.75 17.68,21.95 U$3.3
REL3  (via drill 0.36)
  Top 0.203: D9.1 44.04,18.03 42.9,19.18 T4.3 42.82,19.25 v42.82,20.75
  Bottom 0.203: v42.82,20.75 42.82,21.95 U$4.3
RES  (via drill 0.36, 0.6)
  Top 0.203: v35.48,40.44 36.58,40.44 ATTINY85.1 | v35.48,40.44 35.43,40.51 35.15,40.79 35.15,42.14 37.59,44.58 RESET.P$2 38.43,44.6 v39.75,45.92 | U1.1 36.35,34.04 36.96,34.04 38.56,35.64 38.56,36.5 38.33,36.73 35.89,36.73 35.71,36.91 35.71,40.36 v35.48,40.44
  Bottom 0.203: U$2.5 39.7,48.13 40.83,47 | 40.83,47 45.54,42.29 JP3.7 | D10.TP 26.54,39.17 | 26.54,39.17 FUSE1.1 | 26.54,39.17 34.21,39.17 v35.48,40.44 | v39.75,45.92 40.83,47
  other vias: 26.04,37.47
RES1  (via drill 0.36, 0.6)
  Top 0.203: v10.34,40.44 11.43,40.44 ATTINY1.1 | v10.34,40.44 10.29,40.51 10.01,40.79 10.01,42.14 12.45,44.58 RESET1.P$2 13.28,44.6 v14.61,45.92 | U2.1 11.81,34.04 13.41,35.64 13.41,36.5 13.18,36.73 10.74,36.73 10.57,36.91 10.57,40.36 v10.34,40.44
  Bottom 0.203: U$1.5 14.55,48.13 15.68,47 | 15.68,47 20.4,42.29 JP5.7 | D5.TP 1.4,39.17 | 1.4,39.17 FUSE8.1 | 1.4,39.17 9.07,39.17 v10.34,40.44 | v14.61,45.92 15.68,47
  other vias: 0.89,37.47
RES2  (via drill 0.36, 0.6)
  Top 0.203: v10.34,15.04 11.43,15.04 ATTINY2.1 | v10.34,15.04 10.29,15.11 10.01,15.39 10.01,16.74 12.45,19.18 RESET2.P$2 13.28,19.2 v14.61,20.52 | U3.1 11.81,8.64 13.41,10.24 13.41,11.1 13.18,11.33 10.74,11.33 10.57,11.51 10.57,14.96 v10.34,15.04
  Bottom 0.203: U$3.5 14.55,22.73 15.68,21.6 | 15.68,21.6 20.4,16.89 JP8.7 | D8.TP 1.4,13.77 | 1.4,13.77 FUSE14.1 | 1.4,13.77 9.07,13.77 v10.34,15.04 | v14.61,20.52 15.68,21.6
  other vias: 0.89,12.07
RES3  (via drill 0.36, 0.6)
  Top 0.203: v35.48,15.04 36.58,15.04 ATTINY3.1 | v35.48,15.04 35.43,15.11 35.15,15.39 35.15,16.74 37.59,19.18 RESET3.P$2 38.43,19.2 v39.75,20.52 | U4.1 36.35,8.64 36.96,8.64 38.56,10.24 38.56,11.1 38.33,11.33 35.89,11.33 35.71,11.51 35.71,14.96 v35.48,15.04
  Bottom 0.203: U$4.5 39.7,22.73 40.83,21.6 | 40.83,21.6 45.54,16.89 JP11.7 | D12.TP 26.54,13.77 | 26.54,13.77 FUSE20.1 | 26.54,13.77 34.21,13.77 v35.48,15.04 | v39.75,20.52 40.83,21.6
  other vias: 26.04,12.07
RESA
  Bottom 0.203: JP1.5 26.54,42.8 FUSE1.2 26.62,40.72 FUSE3.1
RESA1
  Bottom 0.203: JP6.5 1.4,42.8 FUSE8.2 1.47,40.72 FUSE9.1
RESA2
  Bottom 0.203: JP9.5 1.4,17.4 FUSE14.2 1.47,15.32 FUSE15.1
RESA3
  Bottom 0.203: JP12.5 26.54,17.4 FUSE20.2 26.62,15.32 FUSE21.1
SCL  (via drill 0.36)
  Top 0.203: ATTINY85.7 44.45,38.61 45.36,39.52 v45.36,40.59 | U$2.8 36.96,46.89 36.12,46.05 v36.12,44.42 | v39.9,39.67 39.9,40.62 38.89,41.63 U1.7
  Bottom 0.203: JP3.4 46.76,36.17 46.76,37.74 47.35,38.33 47.35,38.89 45.64,40.59 v45.36,40.59 45.29,40.54 44.5,40.54 43.64,39.67 v39.9,39.67 | FUSE4.1 36.65,39.42 38.86,41.63 U1.7 38.81,41.73 v36.12,44.42 36.04,44.48 28.93,44.48 27.81,45.59 JP1.3
SCL1  (via drill 0.36)
  Top 0.203: ATTINY1.7 19.3,38.61 20.22,39.52 v20.22,40.59 | U$1.8 11.81,46.89 10.97,46.05 v10.97,44.42 | v14.76,39.67 14.76,40.62 13.74,41.63 U2.7
  Bottom 0.203: JP5.4 21.61,36.17 21.61,37.74 22.2,38.33 22.2,38.89 20.5,40.59 v20.22,40.59 20.14,40.54 19.36,40.54 18.49,39.67 v14.76,39.67 | FUSE10.1 11.51,39.42 13.72,41.63 U2.7 13.67,41.73 v10.97,44.42 10.9,44.48 3.79,44.48 2.67,45.59 JP6.3
SCL2  (via drill 0.36)
  Top 0.203: ATTINY2.7 19.3,13.21 20.22,14.12 v20.22,15.19 | U$3.8 11.81,21.49 10.97,20.65 v10.97,19.02 | v14.76,14.28 14.76,15.21 13.74,16.23 U3.7
  Bottom 0.203: JP8.4 21.61,10.77 21.61,12.34 22.2,12.93 22.2,13.49 20.5,15.19 v20.22,15.19 20.14,15.14 19.36,15.14 18.49,14.28 v14.76,14.28 | FUSE16.1 11.51,14.02 13.72,16.23 U3.7 13.67,16.33 v10.97,19.02 10.9,19.07 3.79,19.07 2.67,20.19 JP9.3
SCL3  (via drill 0.36)
  Top 0.203: ATTINY3.7 44.45,13.21 45.36,14.12 v45.36,15.19 | U$4.8 36.96,21.49 36.12,20.65 v36.12,19.02 | v39.9,14.28 39.9,15.21 38.89,16.23 U4.7
  Bottom 0.203: JP11.4 46.76,10.77 46.76,12.34 47.35,12.93 47.35,13.49 45.64,15.19 v45.36,15.19 45.29,15.14 44.5,15.14 43.64,14.28 v39.9,14.28 | FUSE22.1 36.65,14.02 38.86,16.23 U4.7 38.81,16.33 v36.12,19.02 36.04,19.07 28.93,19.07 27.81,20.19 JP12.3
SDA  (via drill 0.36)
  Top 0.203: ATTINY85.5 43.87,35.79 44.64,35.01 | 44.64,35.01 46.76,32.89 46.76,31.09 JP3.2 | U$2.6 39.29,48.13 36.93,45.77 v36.78,45.77 | 44.64,35.01 44.81,35.18 v44.81,35.2
  Bottom 0.203: 37.66,38.37 39.75,40.46 40.06,40.46 | 37.66,38.37 36.65,37.36 FUSE5.1 | 40.06,40.46 42.77,40.46 43.94,41.63 U1.5 | 40.06,40.46 40.06,42.14 36.78,45.41 v36.78,45.77 36.7,45.59 JP1.4 | v44.81,35.2 42.49,35.2 42.04,35.66 40.36,35.66 37.66,38.37
SDA1  (via drill 0.36)
  Top 0.203: ATTINY1.5 18.72,35.79 19.49,35.01 | 19.49,35.01 21.61,32.89 21.61,31.09 JP5.2 | U$1.6 14.15,48.13 11.79,45.77 v11.63,45.77 | 19.49,35.01 19.66,35.18 v19.66,35.2
  Bottom 0.203: 12.51,38.37 14.61,40.46 14.91,40.46 | 12.51,38.37 11.51,37.36 FUSE11.1 | 14.91,40.46 17.63,40.46 18.8,41.63 U2.5 | 14.91,40.46 14.91,42.14 11.63,45.41 v11.63,45.77 11.56,45.59 JP6.4 | v19.66,35.2 17.35,35.2 16.89,35.66 15.21,35.66 12.51,38.37
SDA2  (via drill 0.36)
  Top 0.203: ATTINY2.5 18.72,10.39 19.49,9.61 | 19.49,9.61 21.61,7.49 21.61,5.69 JP8.2 | U$3.6 14.15,22.73 11.79,20.37 v11.63,20.37 | 19.49,9.61 19.66,9.78 v19.66,9.8
  Bottom 0.203: 12.51,12.97 14.61,15.06 14.91,15.06 | 12.51,12.97 11.51,11.96 FUSE17.1 | 14.91,15.06 17.63,15.06 18.8,16.23 U3.5 | 14.91,15.06 14.91,16.74 11.63,20.02 v11.63,20.37 11.56,20.19 JP9.4 | v19.66,9.8 17.35,9.8 16.89,10.26 15.21,10.26 12.51,12.97
SDA3  (via drill 0.36)
  Top 0.203: ATTINY3.5 43.87,10.39 44.64,9.61 | 44.64,9.61 46.76,7.49 46.76,5.69 JP11.2 | U$4.6 39.29,22.73 36.93,20.37 v36.78,20.37 | 44.64,9.61 44.81,9.78 v44.81,9.8
  Bottom 0.203: 37.66,12.97 39.75,15.06 40.06,15.06 | 37.66,12.97 36.65,11.96 FUSE23.1 | 40.06,15.06 42.77,15.06 43.94,16.23 U4.5 | 40.06,15.06 40.06,16.74 36.78,20.02 v36.78,20.37 36.7,20.19 JP12.4 | v44.81,9.8 42.49,9.8 42.04,10.26 40.36,10.26 37.66,12.97
USBM  (via drill 0.36)
  Top 0.203: v41.78,31.67 41.4,32.05 40.89,32.05 RN1.4 | ATTINY85.2 39.29,38.61 39.53,38.37 | 39.53,38.37 39.78,38.12 39.78,34.92 38.89,34.04 U1.2 | v41.81,43.13 41.58,43.13 41.28,42.82 40.92,42.82 40.23,42.14 40.23,40.87 40.56,40.54 40.56,39.4 40.47,39.31 | 39.53,38.37 40.47,39.31 | JP3.5 48.01,37.29 v46.69,38.61 | 40.47,39.31 v40.77,39.01
  Bottom 0.203: v41.78,31.67 41.53,31.67 39.19,34.01 38.89,34.01 U1.2 | U$2.7 36.96,47.78 39.5,45.24 40.36,45.24 41.81,43.79 v41.81,43.13 | v46.69,38.61 46.33,38.61 45.9,39.04 40.79,39.04 v40.77,39.01
USBM1  (via drill 0.36)
  Top 0.203: v16.64,31.67 16.26,32.05 RN4.4 | ATTINY1.2 14.15,38.61 14.39,38.37 | 14.39,38.37 14.63,38.12 14.63,34.92 U2.2 | v16.66,43.13 16.43,43.13 16.13,42.82 15.77,42.82 15.09,42.14 15.09,40.87 15.42,40.54 15.42,39.4 15.33,39.31 | 14.39,38.37 15.33,39.31 | JP5.5 22.86,37.29 v21.54,38.61 | 15.33,39.31 v15.62,39.01
  Bottom 0.203: v16.64,31.67 16.38,31.67 14.05,34.01 13.74,34.01 U2.2 | U$1.7 11.81,47.78 14.35,45.24 15.21,45.24 16.66,43.79 v16.66,43.13 | v21.54,38.61 21.18,38.61 20.75,39.04 15.65,39.04 v15.62,39.01
USBM2  (via drill 0.36)
  Top 0.203: v16.64,6.27 16.26,6.66 RN7.4 | ATTINY2.2 14.15,13.21 14.39,12.97 | 14.39,12.97 14.63,12.73 14.63,9.53 U3.2 | v16.66,17.73 16.43,17.73 16.13,17.42 15.77,17.42 15.09,16.74 15.09,15.47 15.42,15.14 15.42,14 15.33,13.91 | 14.39,12.97 15.33,13.91 | JP8.5 22.86,11.89 v21.54,13.21 | 15.33,13.91 v15.62,13.61
  Bottom 0.203: v16.64,6.27 16.38,6.27 14.05,8.61 13.74,8.61 U3.2 | U$3.7 11.81,22.38 14.35,19.84 15.21,19.84 16.66,18.39 v16.66,17.73 | v21.54,13.21 21.18,13.21 20.75,13.64 15.65,13.64 v15.62,13.61
USBM3  (via drill 0.36)
  Top 0.203: v41.78,6.27 41.4,6.66 40.89,6.66 RN10.4 | ATTINY3.2 39.29,13.21 39.53,12.97 | 39.53,12.97 39.78,12.73 39.78,9.53 38.89,8.64 U4.2 | v41.81,17.73 41.58,17.73 41.28,17.42 40.92,17.42 40.23,16.74 40.23,15.47 40.56,15.14 40.56,14 40.47,13.91 | 39.53,12.97 40.47,13.91 | JP11.5 48.01,11.89 v46.69,13.21 | 40.47,13.91 v40.77,13.61
  Bottom 0.203: v41.78,6.27 41.53,6.27 39.19,8.61 38.89,8.61 U4.2 | U$4.7 36.96,22.38 39.5,19.84 40.36,19.84 41.81,18.39 v41.81,17.73 | v46.69,13.21 46.33,13.21 45.9,13.64 40.79,13.64 v40.77,13.61
USBP  (via drill 0.36)
  Top 0.203: v42.57,29.67 42.52,29.62 41.61,29.62 41.58,29.64 40.89,29.64 RN1.1 40.79,29.64 40.64,29.64 40.08,29.08 37.01,29.08 36.22,28.3 35.03,28.3 34.7,27.96 29.21,27.96 27.92,29.26 27.92,32.72 28.4,33.2 28.4,39.8 28.93,40.34 28.93,41.66 28.27,42.32 v28.27,46.41 | ATTINY85.3 38.61,37.34 v39.12,37.85 | v40.64,36.32 40.64,34.8 41.4,34.04 U1.3 | JP3.6 46.89,39.75 46.02,38.89 46.02,38.33 46.1,38.25 v46.1,37.34
  Bottom 0.203: v42.57,29.67 42.57,32.87 41.43,34.01 U1.3 | v39.12,37.85 v40.64,36.32 40.72,36.37 42.98,38.63 45.72,38.63 46.1,38.25 v46.1,37.34 | U$2.9 31.57,48.13 30.1,46.66 28.52,46.66 v28.27,46.41
USBP1  (via drill 0.36)
  Top 0.203: v17.42,29.67 17.37,29.62 16.46,29.62 16.43,29.64 15.75,29.64 RN4.1 15.65,29.64 15.49,29.64 14.93,29.08 11.86,29.08 11.07,28.3 9.88,28.3 9.55,27.96 4.06,27.96 2.77,29.26 2.77,32.72 3.25,33.2 3.25,39.8 3.79,40.34 3.79,41.66 3.12,42.32 v3.12,46.41 | ATTINY1.3 13.46,37.34 v13.97,37.85 | v15.49,36.32 15.49,34.8 16.26,34.04 U2.3 | JP5.6 21.74,39.75 20.88,38.89 20.88,38.33 20.96,38.25 v20.96,37.34
  Bottom 0.203: v17.42,29.67 17.42,32.87 16.28,34.01 U2.3 | v13.97,37.85 v15.49,36.32 15.57,36.37 17.83,38.63 20.57,38.63 20.96,38.25 v20.96,37.34 | U$1.9 6.43,48.13 4.95,46.66 3.38,46.66 v3.12,46.41
USBP2  (via drill 0.36)
  Top 0.203: v17.42,4.27 17.37,4.22 16.46,4.22 16.43,4.24 15.75,4.24 RN7.1 15.65,4.24 15.49,4.24 14.93,3.68 11.86,3.68 11.07,2.9 9.88,2.9 9.55,2.57 4.06,2.57 2.77,3.86 2.77,7.32 3.25,7.8 3.25,14.4 3.79,14.94 3.79,16.26 3.12,16.92 v3.12,21.01 | ATTINY2.3 13.46,11.94 v13.97,12.45 | v15.49,10.92 15.49,9.4 16.26,8.64 U3.3 | JP8.6 21.74,14.35 20.88,13.49 20.88,12.93 20.96,12.85 v20.96,11.94
  Bottom 0.203: v17.42,4.27 17.42,7.47 16.28,8.61 U3.3 | v13.97,12.45 v15.49,10.92 15.57,10.97 17.83,13.23 20.57,13.23 20.96,12.85 v20.96,11.94 | U$3.9 6.43,22.73 4.95,21.26 3.38,21.26 v3.12,21.01
USBP3  (via drill 0.36)
  Top 0.203: v42.57,4.27 42.52,4.22 41.61,4.22 41.58,4.24 40.89,4.24 RN10.1 40.79,4.24 40.64,4.24 40.08,3.68 37.01,3.68 36.22,2.9 35.03,2.9 34.7,2.57 29.21,2.57 27.92,3.86 27.92,7.32 28.4,7.8 28.4,14.4 28.93,14.94 28.93,16.26 28.27,16.92 v28.27,21.01 | ATTINY3.3 38.61,11.94 v39.12,12.45 | v40.64,10.92 40.64,9.4 41.4,8.64 U4.3 | JP11.6 46.89,14.35 46.02,13.49 46.02,12.93 46.1,12.85 v46.1,11.94
  Bottom 0.203: v42.57,4.27 42.57,7.47 41.43,8.61 U4.3 | v39.12,12.45 v40.64,10.92 40.72,10.97 42.98,13.23 45.72,13.23 46.1,12.85 v46.1,11.94 | U$4.9 31.57,22.73 30.1,21.26 28.52,21.26 v28.27,21.01
VCC  (via drill 0.36)
  Top 0.203: 41.21,44.67 42.04,45.49 42.04,46.81 | 41.21,44.67 40.79,44.25 T1.2 40.69,43.59 40.56,43.46 39.01,43.46 37.21,41.66 36.35,41.66 U1.8 | U$2.4 42.04,46.81 | ATTINY85.8 43.87,40.08 42.6,41.35 42.6,43.28 41.21,44.67 | v45.36,44.98 44.14,44.98 43.48,45.64 43.48,46.43 43.1,46.81 42.04,46.81 | v41.89,30.28 42.6,30.99 RN2.1 | JP2.3 37.08,28.57 40.16,28.57 40.51,28.93 v41.63,28.93 41.45,28.85 42.67,27.64 46.23,27.64 46.41,27.81 46.41,29.08 46.36,29.13 46.36,31.93 45.39,32.89 44.65,32.89 44.22,32.46 44.22,32.26 RN2.6 | JP1.2 29.92,48.72 C3.2 31.42,48.64 33.5,46.56 33.5,43.66 32.79,42.95 32.79,41.61 | 32.79,41.61 32.79,40.28 RN3.5 32.56,40.18 32.13,39.75 32.13,38.23 32.56,37.8 RN3.8 32.87,37.77 v34.57,36.07 | 32.79,41.61 v33.1,41.61
  Bottom 0.203: U1.8 36.32,41.63 35.74,41.63 34.82,40.72 FUSE6.1 33.1,40.79 v33.1,41.61 | JP3.9 47.75,47.37 v45.36,44.98 | 41.89,29.19 v41.89,30.28 | v41.63,28.93 41.89,29.19 | JP2.3 36.93,28.42 36.93,28.98 C1.2 | 34.44,31.55 33.38,31.55 IC2.2 | 34.44,31.55 35.94,31.55 FUSE2.2 | 34.44,31.55 34.44,34.19 34.57,34.31 34.57,35.2 | v34.57,36.07 34.57,35.2 | 34.57,35.2 41.91,35.2 42.6,34.52 42.6,33.73 43.23,33.1 43.23,29.39 42.85,29.01 42.29,29.01 42.16,29.13 41.96,29.13 41.89,29.19
VCC1  (via drill 0.36)
  Top 0.203: 16.07,44.67 16.89,45.49 16.89,46.81 | 16.07,44.67 15.65,44.25 15.65,43.64 T2.2 15.54,43.59 15.42,43.46 13.87,43.46 12.07,41.66 U2.8 | U$1.4 16.89,46.81 | ATTINY1.8 18.72,40.08 17.45,41.35 17.45,43.28 16.07,44.67 | v20.22,44.98 19,44.98 18.34,45.64 18.34,46.43 17.96,46.81 16.89,46.81 | v16.74,30.28 17.45,30.99 RN5.1 | JP4.3 11.94,28.57 15.01,28.57 15.37,28.93 v16.49,28.93 16.31,28.85 17.53,27.64 21.08,27.64 21.26,27.81 21.26,29.08 21.21,29.13 21.21,31.93 20.24,32.89 19.51,32.89 19.07,32.46 19.07,32.26 RN5.6 | JP6.2 4.78,48.72 C7.2 6.27,48.64 8.36,46.56 8.36,43.66 7.64,42.95 7.64,41.61 | 7.64,41.61 7.64,40.28 RN6.5 7.62,40.18 7.42,40.18 6.98,39.75 6.98,38.23 7.42,37.8 7.62,37.8 RN6.8 7.72,37.77 v9.42,36.07 | 7.64,41.61 v7.95,41.61
  Bottom 0.203: U2.8 11.18,41.63 10.59,41.63 9.68,40.72 FUSE12.1 7.95,40.79 v7.95,41.61 | JP5.9 22.61,47.37 v20.22,44.98 | 16.74,29.19 v16.74,30.28 | v16.49,28.93 16.74,29.19 | JP4.3 11.79,28.42 11.79,28.98 C4.2 | 9.3,31.55 8.23,31.55 IC1.2 | 9.3,31.55 10.8,31.55 FUSE7.2 | 9.3,31.55 9.3,34.19 9.42,34.31 9.42,35.2 | v9.42,36.07 9.42,35.2 | 9.42,35.2 16.76,35.2 17.45,34.52 17.45,33.73 18.08,33.1 18.08,29.39 17.7,29.01 17.14,29.01 17.02,29.13 16.82,29.13 16.74,29.19
VCC2  (via drill 0.36)
  Top 0.203: 16.07,19.27 16.89,20.09 16.89,21.41 | 16.07,19.27 15.65,18.85 15.65,18.24 T3.2 15.54,18.19 15.42,18.06 13.87,18.06 12.07,16.26 U3.8 | U$3.4 16.89,21.41 | ATTINY2.8 18.72,14.68 17.45,15.95 17.45,17.88 16.07,19.27 | v20.22,19.58 19,19.58 18.34,20.24 18.34,21.03 17.96,21.41 16.89,21.41 | v16.74,4.88 17.45,5.59 RN8.1 | JP7.3 11.94,3.18 15.01,3.18 15.37,3.53 v16.49,3.53 16.31,3.45 17.53,2.23 21.08,2.23 21.26,2.41 21.26,3.68 21.21,3.73 21.21,6.53 20.24,7.49 19.51,7.49 19.07,7.06 RN8.6 | JP9.2 4.78,23.32 C11.2 6.27,23.24 8.36,21.16 8.36,18.26 7.64,17.55 7.64,16.2 | 7.64,16.2 7.64,14.88 RN9.5 7.62,14.78 7.42,14.78 6.98,14.35 6.98,12.83 7.42,12.4 7.62,12.4 RN9.8 7.72,12.37 v9.42,10.67 | 7.64,16.2 v7.95,16.2
  Bottom 0.203: U3.8 11.18,16.23 10.59,16.23 9.68,15.32 FUSE18.1 7.95,15.39 v7.95,16.2 | JP8.9 22.61,21.97 v20.22,19.58 | 16.74,3.79 v16.74,4.88 | v16.49,3.53 16.74,3.79 | JP7.3 11.79,3.02 11.79,3.58 C9.2 | 9.3,6.15 8.23,6.15 IC3.2 | 9.3,6.15 10.8,6.15 FUSE13.2 | 9.3,6.15 9.3,8.79 9.42,8.91 9.42,9.8 | v9.42,10.67 9.42,9.8 | 9.42,9.8 16.76,9.8 17.45,9.12 17.45,8.33 18.08,7.7 18.08,3.99 17.7,3.61 17.14,3.61 17.02,3.73 16.82,3.73 16.74,3.79
VCC3  (via drill 0.36)
  Top 0.203: 41.21,19.27 42.04,20.09 42.04,21.41 | 41.21,19.27 40.79,18.85 T4.2 40.69,18.19 40.56,18.06 39.01,18.06 37.21,16.26 36.35,16.26 U4.8 | U$4.4 42.04,21.41 | ATTINY3.8 43.87,14.68 42.6,15.95 42.6,17.88 41.21,19.27 | v45.36,19.58 44.14,19.58 43.48,20.24 43.48,21.03 43.1,21.41 42.04,21.41 | v41.89,4.88 42.6,5.59 RN11.1 | JP10.3 37.08,3.18 40.16,3.18 40.51,3.53 v41.63,3.53 41.45,3.45 42.67,2.23 46.23,2.23 46.41,2.41 46.41,3.68 46.36,3.73 46.36,6.53 45.39,7.49 44.65,7.49 44.22,7.06 RN11.6 | JP12.2 29.92,23.32 C15.2 31.42,23.24 33.5,21.16 33.5,18.26 32.79,17.55 32.79,16.2 | 32.79,16.2 32.79,14.88 RN12.5 32.56,14.78 32.13,14.35 32.13,12.83 32.56,12.4 RN12.8 32.87,12.37 v34.57,10.67 | 32.79,16.2 v33.1,16.2
  Bottom 0.203: U4.8 36.32,16.23 35.74,16.23 34.82,15.32 FUSE24.1 33.1,15.39 v33.1,16.2 | JP11.9 47.75,21.97 v45.36,19.58 | 41.89,3.79 v41.89,4.88 | v41.63,3.53 41.89,3.79 | JP10.3 36.93,3.02 36.93,3.58 C13.2 | 34.44,6.15 33.38,6.15 IC4.2 | 34.44,6.15 35.94,6.15 FUSE19.2 | 34.44,6.15 34.44,8.79 34.57,8.91 34.57,9.8 | v34.57,10.67 34.57,9.8 | 34.57,9.8 41.91,9.8 42.6,9.12 42.6,8.33 43.23,7.7 43.23,3.99 42.85,3.61 42.29,3.61 42.16,3.73 41.96,3.73 41.89,3.79
VIN
  Bottom 0.203: IC2.3 34.8,30.66 FUSE2.1 36.02,30.61 37.92,30.61 38.23,30.3 40.59,30.3 | JP2.1 C2.2 40.59,28.98 40.59,30.3 | 40.59,30.3 40.59,31.12 R2.1
VIN1
  Bottom 0.203: IC1.3 9.65,30.66 FUSE7.1 10.87,30.61 12.78,30.61 13.08,30.3 15.44,30.3 | JP4.1 C6.2 15.44,28.98 15.44,30.3 | 15.44,30.3 R1.1
VIN2
  Bottom 0.203: IC3.3 9.65,5.26 FUSE13.1 10.87,5.21 12.78,5.21 13.08,4.9 15.44,4.9 | JP7.1 C10.2 15.44,3.58 15.44,4.9 | 15.44,4.9 R7.1
VIN3
  Bottom 0.203: IC4.3 34.8,5.26 FUSE19.1 36.02,5.21 37.92,5.21 38.23,4.9 40.59,4.9 | JP10.1 C14.2 40.59,3.58 40.59,4.9 | 40.59,4.9 40.59,5.71 R10.1
VUSB  (via drill 0.36)
  Top 0.203: v35.1,33.2 32.59,33.2 32.11,32.72 X5.VBUS 32,32.66 30.89,32.66 30.58,32.36 29.39,32.36 29.34,32.41 28.96,32.41 X6.VBUS
  Bottom 0.203: R2.2 37.8,31.12 36.07,32.84 35.46,32.84 v35.1,33.2
VUSB1  (via drill 0.36)
  Top 0.203: v9.96,33.2 7.44,33.2 6.96,32.72 X1.VBUS 6.86,32.66 5.74,32.66 5.44,32.36 4.24,32.36 4.19,32.41 3.81,32.41 X2.VBUS
  Bottom 0.203: R1.2 12.65,31.12 10.92,32.84 10.31,32.84 v9.96,33.2
VUSB2  (via drill 0.36)
  Top 0.203: v9.96,7.8 7.44,7.8 6.96,7.32 X3.VBUS 6.86,7.26 5.74,7.26 5.44,6.96 4.24,6.96 4.19,7.01 3.81,7.01 X4.VBUS
  Bottom 0.203: R7.2 12.65,5.71 10.92,7.44 10.31,7.44 v9.96,7.8
VUSB3  (via drill 0.36)
  Top 0.203: v35.1,7.8 32.59,7.8 32.11,7.32 X7.VBUS 32,7.26 30.89,7.26 30.58,6.96 29.39,6.96 29.34,7.01 28.96,7.01 X8.VBUS
  Bottom 0.203: R10.2 37.8,5.71 36.07,7.44 35.46,7.44 v35.1,7.8

## Text on the board
tNames: 1 | +5 | 1 | +5 | SCL | SDA | GND | +5V | SCL | SDA | GND | +5V | GND | GND | Reset | 5 | Reset | 5 | 4 | 4 | 3 | 3 | D10 | D10 | 2 | 2 | Tiny85 | Tiny85 | 1 | 1 | 0 | 0 | PB1 | Pwr | PB1 | Pwr | +5 | GND | Vin | +5 | GND | Vin | +5 | +5 | 1 | SCL | SDA | GND | 1 | SCL | SDA | GND | +5V | +5V | GND | GND | Reset | 5 | Reset | 5 | 4 | 4 | D10 | 3 | D10 | 3 | 2 | 2 | Tiny85 | Tiny85 | 1 | 1 | 0 | 0 | PB1 | Pwr | PB1 | Pwr | +5 | GND | Vin | +5 | GND | Vin
bNames: 4 | 4 | 3 | 3 | RES | Rel | GND | RES | Rel | GND | Bobricius | +5V | Bobricius | +5V | GND | GND | ATTINY85 | ATTINY85 | 5 | 5 | SCL | SCL | SJ1 | SJ2 | SJ3 | 4 | SJ1 | SJ2 | SJ3 | 4 | D10 | SDA | 3 | D10 | SDA | 3 | 2 | 2 | Made in Slovakia | Made in Slovakia | 1 | 1 | 100n | 0 | 100n | 0 | GND | GND | 4 | 4 | 3 | 3 | RES | Rel | GND | RES | Rel | GND | Bobricius | +5V | Bobricius | +5V | GND | GND | ATTINY85 | ATTINY85 | 5 | 5 | SJ1 | SJ2 | SJ3 | SCL | 4 | SJ1 | SJ2 | SJ3 | SCL | 4 | SDA | SDA | D10 | 3 | D10 | 3 | 2 | 2 | Made in Slovakia | Made in Slovakia | 1 | 1 | 100n | 100n | 0 | 0 | GND | GND